# Altium PCB Copy of arduino_motor1.PcbDoc
Units mm, origin at the board's own origin, x right, y up, seen from the top; angles counter-clockwise.
Board outline 69.39 x 50.72 mm, 2 copper layers (Top Layer, Bottom Layer); 23 components, 22 nets, 93 pads, 0 vias.
Unrouted connection lines stored in the file: 9.
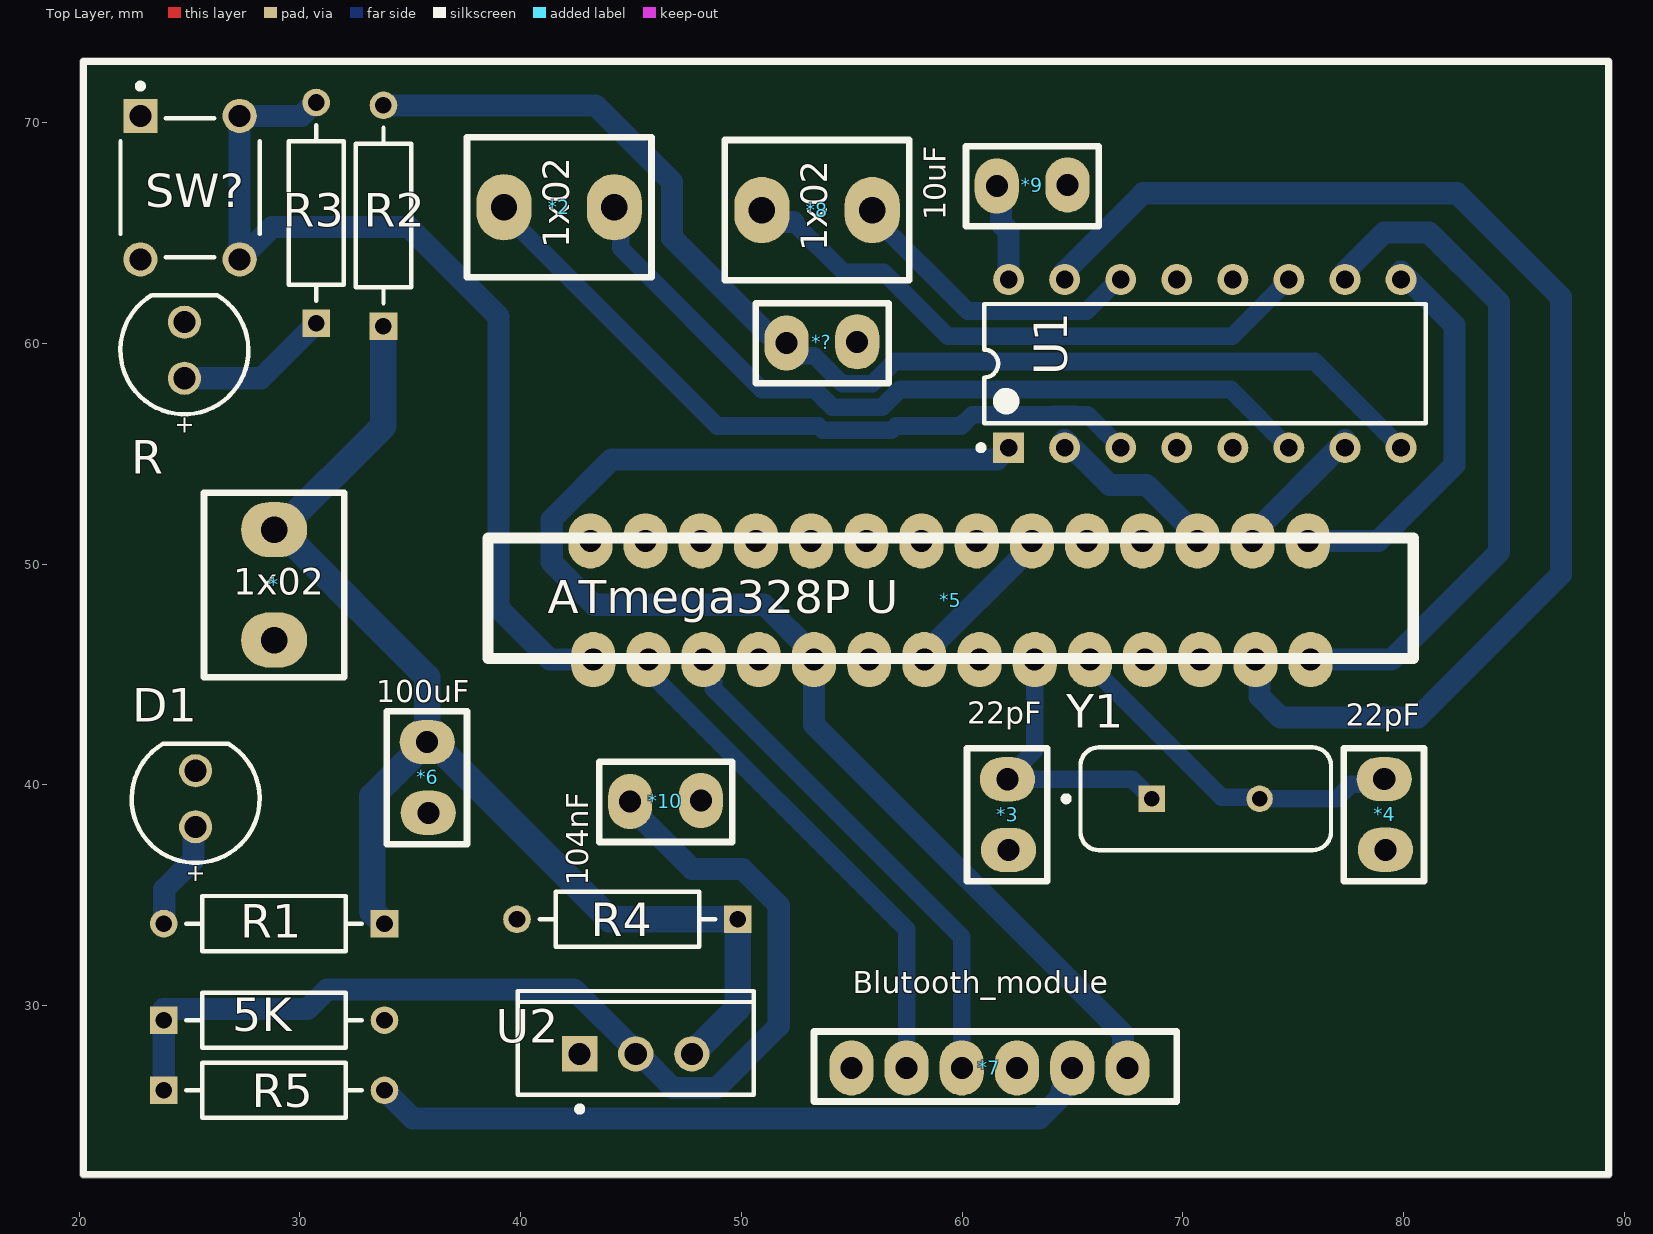
[diagram p0: Top Layer view]
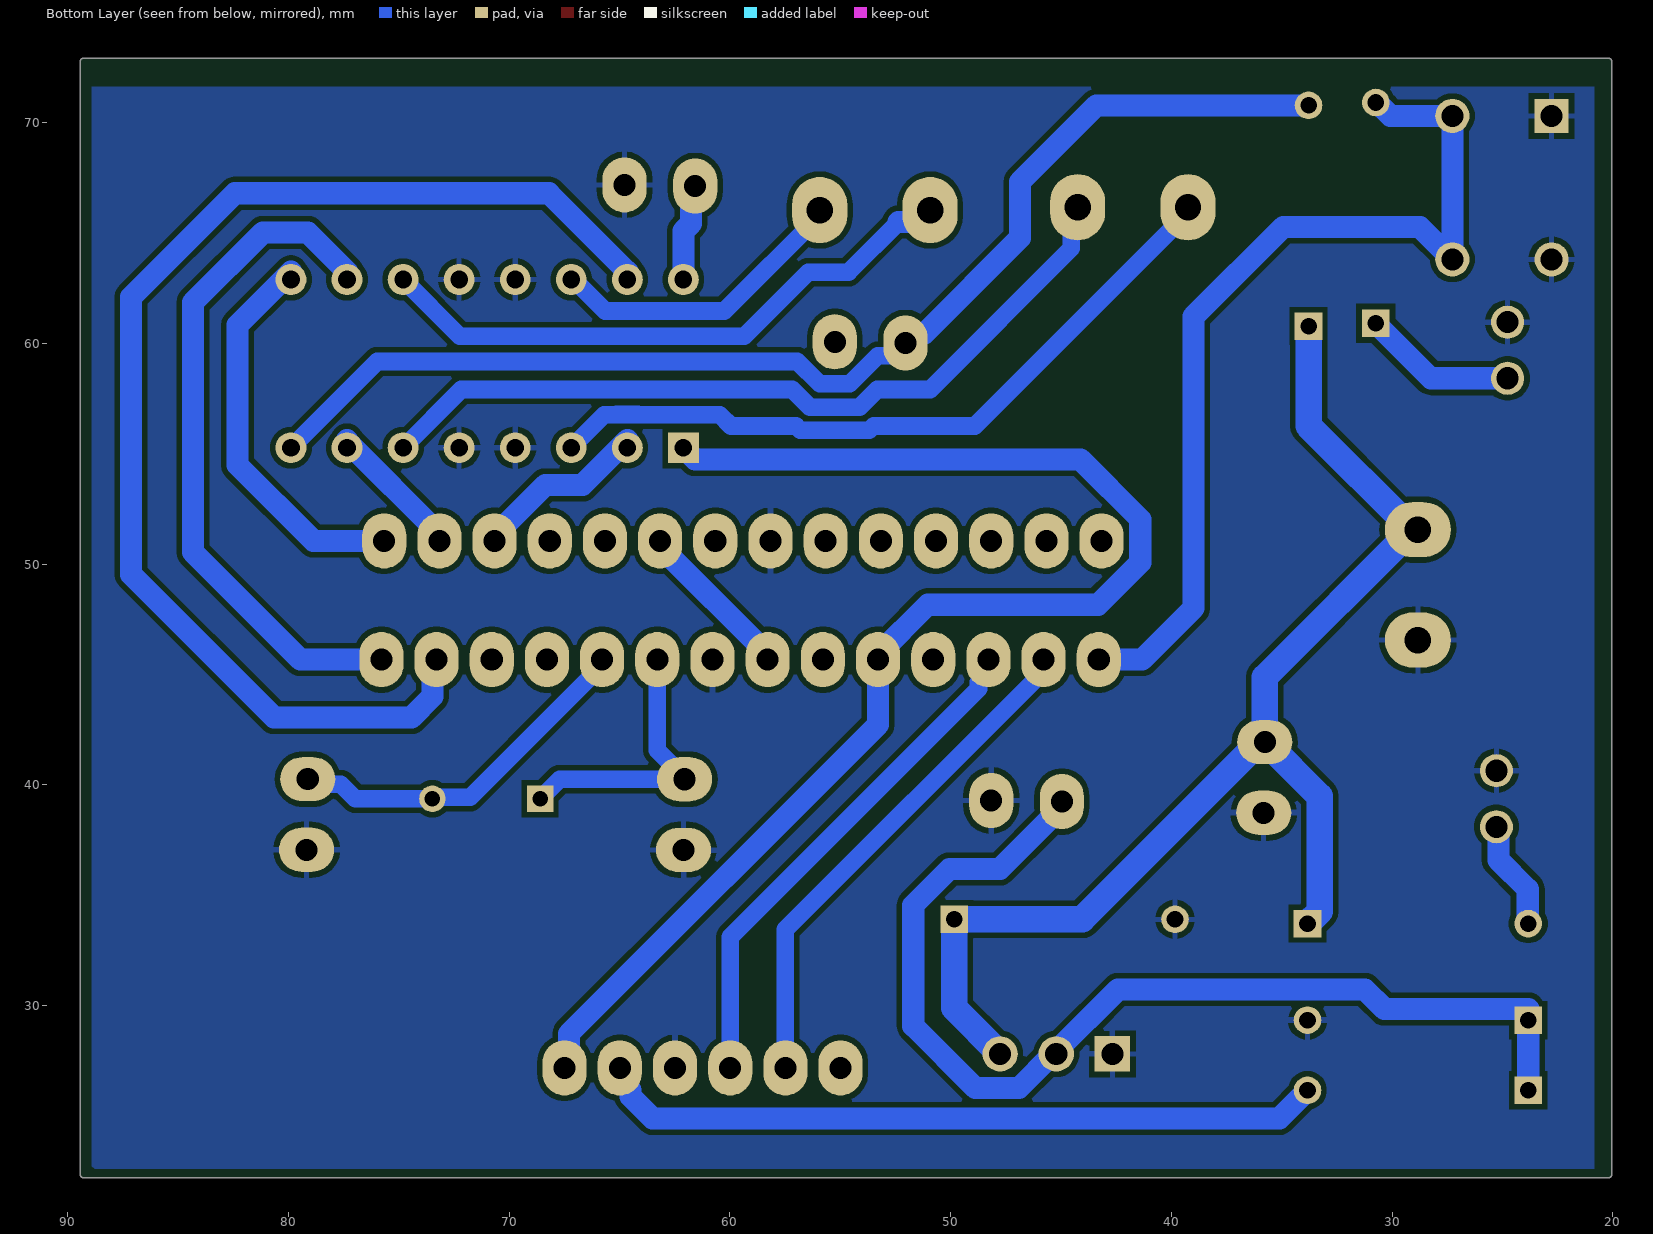
[diagram p1: Bottom Layer view, seen from below]

## Layer stack, top to bottom
Top Solder: solder mask 0.0102, Solder Resist, Dk 3.5
Top Layer: signal copper 0.0356
Dielectric 1: dielectric 0.32, FR-4, Dk 4.8
Bottom Layer: signal copper 0.0356
Bottom Solder: solder mask 0.0102, Solder Resist, Dk 3.5

## Board outline
20.193,22.202 cw(c20.193,22.352) 20.043,22.352 20.043,72.771 cw(c20.193,72.771) 20.193,72.921 89.281,72.921 cw(c89.281,72.771) 89.431,72.771 89.431,22.352 cw(c89.281,22.352) 89.281,22.202

## Design rules (kind name [scope] priority, off if disabled: settings)
Clearance Clearance_1 [All] p1: gap=0.254 ignorepadtopadclearanceinfootprint=FALSE
Clearance [All] p2: gap=0.254 ignorepadtopadclearanceinfootprint=FALSE
PolygonConnect [All] p1: connectstyle=Relief reliefconductorwidth=0.254 reliefentries=4 polygonreliefangle="90 Angle" airgapwidth=0.254
RoutingVias [All] p1: holewidth=0.711 width=1.27 viastyle="Through Hole" minholewidth=0.711 minwidth=1.27 maxholewidth=0.711 maxwidth=1.27
SolderMaskExpansion [All] p1: expansion=0.102 istentingtop=FALSE
Width Width_4 [All] p1: maxlimit=1.2 minlimit=0.254 preferedwidth=0.8
Width Width_3 [All] p2: maxlimit=1.2 minlimit=0.254 preferedwidth=0.8 toplayer_maxwidth=0.254 toplayer_prefwidth=0.254 minimp=50.000000 maximp=50.000000 favimp=50.000000
Width Width_2 [All] p3: maxlimit=1.2 minlimit=0.254 preferedwidth=0.254 toplayer_maxwidth=0.254 minimp=50.000000 maximp=50.000000 favimp=50.000000
Width [All] p4: maxlimit=0.254 minlimit=0.254 preferedwidth=0.254
Width Width_1 [(InNet('GND') AND OnLayer('Bottom 3D Body'))] p5: maxlimit=1.2 minlimit=0.254 preferedwidth=0.254 toplayer_maxwidth=0.254 minimp=50.000000 maximp=50.000000 favimp=50.000000
30 further rules are at their usual default settings.

## Components (designator, comment, footprint, x,y, rotation, side; value= is the part's Value field where it differs from the comment)
5K "MRS25000C1001FCT00" FP-MRS25-MFG 28.829,29.337 r0 top
* "Component_1" PCBComponent_1#1 28.448,50.546 r0 top
*2 "Component_1" PCBComponent_1#1 40.259,65.786 r90 top
*3 "capacitor" PCBComponent_1#2 60.397,41.779 r0 top
*4 "capacitor" PCBComponent_1#2 77.47,41.783 r0 top
*5 "Component_1" PCBComponent_1#3 43.986,47.502 r90 top
*6 "capacitor" PCBComponent_1#2 34.112,43.459 r0 top
*7 "Component_1" PCBComponent_1#4 58.286,28.956 r90 top
*8 "Component_1" PCBComponent_1#1 51.943,65.659 r90 top
*9 "capacitor" PCBComponent_1#2 60.046,65.481 r90 top
*10 "capacitor" PCBComponent_1#2 43.434,37.592 r90 top
*? "capacitor" PCBComponent_1#2 50.521,58.369 r90 top
D1 "151053GS03000" WL-TMRW_D5.8H11.7 25.273,39.37 r90 top
R "151053GS03000" WL-TMRW_D5.8H11.7 24.765,59.69 r90 top
R1 "MRS25000C1001FCT00" FP-MRS25-MFG 28.829,33.716 r180 top
R2 "MRS25000C1001FCT00" FP-MRS25-MFG 33.782,65.786 r90 top
R3 "MRS25000C1001FCT00" FP-MRS25-MFG 30.734,65.913 r90 top
R4 "MRS25000C1001FCT00" FP-MRS25-MFG 44.831,33.909 r180 top
R5 "MRS25000C1001FCT00" FP-MRS25-MFG 28.829,26.162 r0 top
SW? "EVQ-PAG07K" FP-EVQ-PAG07K-MFG 25.019,67.056 r0 top
U1 "L293D" STM-L293D-16 70.993,59.084 r90 top
U2 "LM317T" NDE0003A 45.212,27.813 r0 top
Y1 "FOXSLF/160-20" FOX-FOXSLF160-20 71.035,39.37 r0 top

## Footprints (in the part's own frame and the unit in brackets; to place one, negate y for a bottom-side part, rotate by r counter-clockwise, add the part's x,y. Pads: shape width x height; smd on the part's side, far side on the other; paste and mask are expansions set on the pad)
FOX-FOXSLF160-20 [mm] "THD, 2-Leads, Body 11.35x4.65mm"
  rect 1.2x1.2 hole 0.7: 1(-2.44,0)
  round 1.2 hole 0.7: 2(2.44,0)
  silkscreen extent -6.45,-2.32 5.68,2.32, body extent -5.67,-2.32 5.68,2.33, height 3.6
FP-EVQ-PAG07K-MFG [mm]
  rect 1.55x1.55 hole 1 paste-2539.97 mask+0: A(-2.25,3.25)
  round 1.55 hole 1 paste-2539.97 mask+0: A'(-2.25,-3.25) B(2.25,3.25) B'(2.25,-3.25)
  silkscreen extent -3.15,-3.15 3.15,4.72, body extent -3.25,-4.13 3.25,4.13, height 0.25
FP-MRS25-MFG [mm]
  rect 1.25x1.25 hole 0.75 paste-2539.97 mask+0: 1(-5,0)
  round 1.25 hole 0.75 paste-2539.97 mask+0: 2(5,0)
  silkscreen extent -3.98,-1.25 3.98,1.25, body extent -5.72,-1.35 5.72,1.35, height 0.25
NDE0003A [mm] "FM, 3-Leads, Body 10.7x4.7mm, Pitch 2.54mm"
  rect 1.6x1.6 hole 1: 1(-2.54,0)
  round 1.6 hole 1: 2(0,0) 3(2.54,0)
  silkscreen extent -5.35,-2.62 5.35,2.85, body extent -5.4,-1.9 5.4,2.9, height 19.4
PCBComponent_1#1 [mm]
  oval 3x2.5 hole 1.2: 1(0.381,1.016) 2(0.381,-3.984)
  silkscreen extent -2.8,-5.66 3.56,2.69
PCBComponent_1#2 [mm]
  oval 2.5x2 hole 1: 1(1.651,-1.524) 2(1.702,-4.724)
  silkscreen extent -0.18,-6.15 3.45,-0.13
PCBComponent_1#3 [mm]
  oval 2.5x2 hole 1: 1(-1.829,0.7) 2(-1.829,-1.8) 3(-1.829,-4.3) 4(-1.829,-6.8) 5(-1.829,-9.3) 6(-1.829,-11.8) 6(3.552,-4.173) 7(-1.829,-14.3) 8(-1.829,-16.8) 8(3.552,0.827) 9(-1.829,-19.3) 10(-1.829,-21.8) 11(-1.829,-24.3) 12(-1.829,-26.8) 13(-1.829,-29.3) 14(-1.829,-31.8) 15(3.552,-31.673) 16(3.552,-29.173) 17(3.552,-26.673) 18(3.552,-24.173) 19(3.552,-21.673) 20(3.552,-19.173) 21(3.552,-16.673) 22(3.552,-14.173) 23(3.552,-11.673) 24(3.552,-9.173) 25(3.552,-6.673) 27(3.552,-1.673)
  silkscreen extent -1.78,-36.45 3.68,5.46
PCBComponent_1#4 [mm]
  oval 2.5x2 hole 1: 1(-1.778,3.302) 2(-1.778,0.802) 3(-1.778,-1.698) 4(-1.778,-4.198) 5(-1.778,-6.698) 6(-1.778,-9.198)
  silkscreen extent -3.3,-11.43 -0.13,5
STM-L293D-16 [mm] "DIP, 16-Leads, Body 20x6.85mm, Pitch 2.54mm"
  rect 1.4x1.4 hole 0.8: 1(-3.81,8.89)
  round 1.4 hole 0.8: 2(-3.81,6.35) 3(-3.81,3.81) 4(-3.81,1.27) 5(-3.81,-1.27) 6(-3.81,-3.81) 7(-3.81,-6.35) 8(-3.81,-8.89) 9(3.81,-8.89) 10(3.81,-6.35) 11(3.81,-3.81) 12(3.81,-1.27) 13(3.81,1.27) 14(3.81,3.81) 15(3.81,6.35) 16(3.81,8.89)
  silkscreen extent -3.93,-10 2.7,10.26, body extent -3.93,-10 3.93,10, height 5.1
WL-TMRW_D5.8H11.7 [mm] "THT Mono-color Round LED, 2-leads"
  round 1.5 hole 1: 1(1.27,0) 2(-1.27,0)
  silkscreen extent -2.9,-2.9 2.5,2.9, body extent -2.9,-2.9 2.5,2.9, height 11.7

## Part data
5K R1 R2 R3 R4 R5: library part CMP-02408-000051-1, "RES 1K OHM 0.6W 1% AXIAL", Case/Package=Axial, Max Operating Temperature=155°C, Max Power Dissipation=600mW, Min Operating Temperature=-55°C, Package Quantity=5000, Resistance=1kR, Resistance Tolerance=1%, Resistor Type="Metal Film", Temperature Coefficient=50ppm/°C, Voltage Rating=350V, Construction=Cylindrical, Contact Plating=Tin, Diameter=2.5mm, Lead Diameter=0.6mm, Lead Free="Lead Free", Length=6.5mm, Military Standard=Not, Mount="Through Hole", Number of Pins=2, Number of Terminations=2, Packaging="Tape and Reel", Power Rating=600mW, Radiation Hardening=No, RoHS Compliant=Yes, Series=MRS25, Technology="THIN FILM", Termination=Axial, Tolerance=1%, Voltage Rating (DC)=350V, Weight=0.00776oz, Width=2.5mm
D1 R: library part CMP-1489-00005-2, Case/Package=Radial, Color=Green, Forward Current=100mA, Forward Voltage=3.4V, Max Operating Temperature=85°C, Max Reverse Voltage (DC)=5V, Min Operating Temperature=-40°C, Test Current=20mA, Dominant Wavelength=522nm, Height=8.6mm, Length=5mm, Lens Size=5mm, Lens Style="Circular, Clear, Round", Luminous Intensity=10cd, Mount="Through Hole", NexarPartId=29717817, Packaging=Bulk, Peak Wavelength=515nm, REACH SVHC=Unknown, RoHS=Compliant, Viewing Angle=30°, Wavelength=522nm, Width=5mm
SW?: library part CMP-05618-000034-1, "SWITCH TACTILE SPST-NO 0.02A 15V", Actuator Color=Black, Contact Current Rating=20mA, Contact Resistance=50mR, Max Operating Temperature=70°C, Max Voltage Rating (DC)=15V, Min Operating Temperature=-20°C, Operating Force=2.6N, Package Quantity=500, Actuator Length=3.1mm, Actuator Type=Standard, Current Rating=20mA, Depth=7.8mm, Electrical Life=50000Cycles, Illumination Type=Non-Illuminated, Lead Free="Lead Free", Length=6mm, Max Current Rating=20mA, Mechanical Life=50000Cycles, Mount="Through Hole", Orientation=Straight, Packaging=Bulk, Radiation Hardening=No, RoHS Compliant=Yes, Series=EVQPA, Size=6mm, Switch Function=Off-Mom, Switch Travel=0.25mm, Termination="PC Pin", Throw Configuration=SPST, Voltage Rating (DC)=15V
U1: library part CMP-2000-06524-1, "Push-Pull Four Channel Driver with Diode, 4.5 to 36 V, -40 to 150 degC, 16-Pin PDIP, RoHS, Tube", Current - Output / Channel=600mA, Current - Peak Output=1.2A, Manufacturer=STMicroelectronics, On-State Resistance=-, Operating Temperature=-40°C~150°C, Package / Case="16-DIP(0.300\",7.62mm)", Package Description="16-Pin Thru-Hole Dual-In-Line, Body 20 x 6.85 mm, Pitch 2.54 mm", Package Reference=DIP-16, Standard Package=25, Supplier Device Package=16-PowerDIP, Voltage - Supply=4.5V~36V, Category=IntegratedCircuits(ICs), Datasheet URL=http://www.st.com/st-web-ui/static/active/en/resource/technical/document/datasheet/CD00000059.pdf, Datasheet Version=07/2003, Dynamic Catalog=HalfBridge, Family=PMIC-MOSFET,BridgeDrivers-InternalSwitch, Input Type=Non-Inverting, Manufacturer URL=http://www.st.com/, Mounting Technology=ThroughHole, Mounting Type=ThroughHole, Number of Outputs=4, Other Names=497-2936-5, Other Related Documents=L293DViewAllSpecifications, Packaging=Tube, PartNumber=L293D, Series=-, Type=HalfBridge
U2: library part CMP-0062-02456-3, "3-Terminal Adjustable Regulator, 3-pin TO-220", Manufacturer="Texas Instruments", PackageTopMarking="NSUZXYTTE#*LM317T P+", PowerWise=N, ComponentLink1Description="Datasheet URL", ComponentLink1URL=http://www.ti.com/general/docs/lit/getliterature.tsp?genericPartNumber=LM317-N&fileType=pdf, CompType="LDO IC", PackageDescription="TO-220, Molded, 3 Lead, Straight", PackageReference=NDE0003A, PinCount=3, RoHS=N
Y1: library part CMP-1749-00003-1, "Resistance Weld Thru-Hole Crystal, 16 MHz, -20 to 70 degC, 2-Pin THD, RoHS, Bulk", Case\Package=Axial, Max Operating Temperature="155 degC", Min Operating Temperature="-55 degC", Package Quantity=200, Power Rating="250 mW", Resistance="221 kohm", Tolerance=1%, Voltage Rating="250 V", ComponentLink1Description="Manufacturer URL", ComponentLink1URL=http://www.foxonline.com/, ComponentLink2Description=Datasheet, ComponentLink2URL=http://www.foxonline.com/pdfs/hc49slf.pdf, DatasheetVersion=Mar-15, Length="0.248 inch", Mount="Through Hole", PackageDescription="2-Pin Through Hole Device, Body 11.35 x 4.65 mm", PackageReference=FOXSLF160-20, Packaging=Bulk, RoHSCompliant=true

## Nets (pads, with @x,y where several pads share a name; then routed paths per layer and width w, separated by ;. In a path a pad name is that pad's centre, name@x,y a point inside that pad or via, vN(x,y) a via of type N, cw(c..) or ccw(c..) an arc to the next point about the centre after c; other vN are vias at no path point)
GND: 5K.2 *3.2 *4.2 *5.8 *5.22 *6.2 *7.4 *9.2 *10.2 *.2 *?.2 D1.1 R4.2 R.1 SW?.A SW?.A' U1.4 U1.5 U1.12 U1.13 U2.1
Net5K_1: 5K.1 *5.7 *5.20 *9.1 *10.1 R5.1 U1.16 U2.2 | length 61.2
  Bottom Layer w1: R5.1 23.829,29.316 23.829,29.845 30.347,29.845 31.236,30.734 42.417,30.734 45.212,27.939 U2.2 45.357,27.813 46.911,26.259 48.865,26.259 51.689,29.083 51.689,34.544 50.038,36.195 47.756,36.195 44.958,38.993 *10.1 ; *5.7 58.286,45.927 63.159,50.8 *5.20 ; *9.1 61.761,66.941 61.761,65.436 62.103,65.094 U1.16
Net*2_1: *2.1 U1.3 | length 33.2
  Bottom Layer w0.8: *2.1@39.243,65.917 48.899,56.261 53.485,56.261 53.687,56.059 56.803,56.059 57.005,56.261 59.944,56.261 60.452,56.769 64.154,56.769 64.165,56.78 65.121,56.78 65.132,56.769 65.688,56.769 U1.3
  Bottom Layer w1: *2.1@39.243,65.917 *2.1
Net*2_2: *2.2 U1.6 | length 36.7
  Bottom Layer w0.8: *2.2@44.53,65.88 44.53,64.309 50.927,57.912 53.324,57.912 54.123,57.113 56.367,57.113 57.166,57.912 72.165,57.912 U1.6
  Bottom Layer w1: *2.2 *2.2@44.53,65.88
Net*3_1: *3.1 *5.9 Y1.1 | length 12.9
  Bottom Layer w0.8: *5.9@63.252,45.639 *5.9 63.286,41.567 62.048,40.329 *3.1 67.71,40.255 Y1.1
Net*4_1: *4.1 *5.10 Y1.2 | length 16.5
  Bottom Layer w0.8: *5.10 65.786,45.423 71.762,39.447 73.398,39.447 Y1.2 76.962,39.37 77.621,40.029 78.891,40.029 *4.1
Net*5_1: *5.1 R3.2 SW?.B SW?.B' | length 42.7
  Bottom Layer w1: R3.2 30.666,70.913 30.059,70.306 SW?.B SW?.B' 28.741,65.278 34.925,65.278 38.989,61.214 38.989,48.006 41.322,45.673 *5.1
Net*5_2: *5.2 *7.2 | length 23.3
  Bottom Layer w0.8: *5.2 45.786,45.146 57.484,33.448 *7.2
Net*5_3: *5.3 *7.3 | length 23.3
  Bottom Layer w0.8: *5.3 48.286,45.098 48.733,44.652 48.733,44.358 59.984,33.107 *7.3
Net*5_5: *5.5 *7.6 U1.1 | length 62.2
  Bottom Layer w1: U1.1 61.566,54.737 44.111,54.737 41.405,52.031 41.405,50.077 43.324,48.159 51.031,48.159 53.286,45.904 *5.5 53.286,42.726 67.293,28.719 67.293,27.369 *7.6
Net*5_13: *5.13 U1.15 | length 56.9
  Bottom Layer w1: U1.15@64.643,63.246 68.199,66.802 82.423,66.802 87.122,62.103 87.122,49.53 80.645,43.053 74.422,43.053 73.477,43.998 73.477,45.482 *5.13
Net*5_14: *5.14 U1.10 | length 30.9
  Bottom Layer w1: *5.14 79.455,45.673 84.328,50.546 84.328,61.849 81.153,65.024 79.121,65.024 U1.10@77.343,63.246
Net*5_15: *5.15 U1.9 | length 17.8
  Bottom Layer w1: *5.15 78.867,51.054 82.296,54.483 82.296,60.833 U1.9@79.883,63.246
Net*5_16: *5.16 U1.7 | length 6.3
  Bottom Layer w1: *5.16 73.159,51.373 77.343,55.557 U1.7@77.343,55.626
Net*5_17: *5.17 U1.2 | length 8
  Bottom Layer w1: U1.2@64.643,55.626 66.684,53.585 68.358,53.585 70.659,51.285 *5.17
Net*6_1: *6.1 *.1 R1.1 R2.1 R4.1 U2.3 | length 57.7
  Bottom Layer w1.2: *.1 *.1@29.079,51.562 ; R2.1 33.782,56.265 *.1@29.079,51.562 ; R1.1 33.274,34.271 33.274,39.48 35.73,41.935 *6.1 ; U2.3 49.831,29.892 R4.1 44.04,33.909 36.013,41.935 *6.1 ; *.1@29.079,51.562 35.763,44.878 *6.1
Net*7_5: *7.5 R5.2 | length 33.1
  Bottom Layer w1: R5.2 35.099,24.892 63.5,24.892 64.492,25.884 64.492,26.166 64.984,26.657 *7.5
Net*8_1: *8.1 U1.11 | length 27.3
  Bottom Layer w0.8: 52.353,65.503 54.627,63.229 56.45,63.229 59.354,60.325 72.234,60.325 U1.11
  Bottom Layer w1: *8.1 51.464,65.503 52.353,65.503
Net*8_2: *8.2 U1.14 | length 13.9
  Bottom Layer w0.8: *8.2@55.927,65.79 60.249,61.468 65.649,61.468 U1.14@67.075,62.894
  Bottom Layer w1: *8.2@55.927,65.79 *8.2 ; U1.14@67.075,62.894 U1.14
Net*?_1: *?.1 R2.2 U1.8 | length 55.2
  Bottom Layer w0.8: *?.1 52.119,60.02 52.704,59.436 53.291,59.436 54.56,58.167 55.93,58.167 56.945,59.182 75.975,59.182 U1.8 ; 55.118,59.944 55.118,60.194 ; 55.139,59.944 55.193,59.944
  Bottom Layer w1: R2.2 43.387,70.786 46.863,67.31 46.863,64.77 51.171,60.462 51.603,60.462 *?.1 ; 55.118,59.944 55.139,59.944
NetD1_2: D1.2 R1.2 | length 5
  Bottom Layer w1: R1.2 23.85,33.737 23.85,35.272 25.177,36.599 25.177,38.005 D1.2
NetR3_1: R3.1 R.2 | length 7
  Bottom Layer w1: R.2 28.241,58.42 R3.1
pads on no net: *5.4 *5.6 *5.11 *5.12 *5.18 *5.19 *5.21 *5.23 *5.24 *5.25 *5.27 *7.1
copper on no net: | length 0.5
  Bottom Layer w1: 70.786,45.152 70.786,45.673

## Polygon pours and split planes (outlines as drawn)
GND on Bottom Layer "NONET_L-01_P-001" (solid, remove dead copper, pour order 0): 20.828,71.628 88.9,71.628 88.9,22.733 88.773,22.606 20.828,22.606

## Silkscreen, mask and mechanical layers (free items; w line width, h text height)
Top Overlay:
  lines w0.3: 20.193,22.352 38.862,22.352 70.612,22.352 89.281,22.352 89.281,46.115 89.281,49.699 89.281,61.849 89.281,72.771 20.193,72.771 20.193,57.203 20.193,39.726 20.193,22.352

## Text inside footprints (layer, text, board x,y; h text height)
*: Top Overlay "1x02" at 26.97,48.611 h1.2
*2: Top Overlay "1x02" at 42.194,64.308 h1.2 r90
*3: Top Overlay "22pF" at 60.24,42.767 h1
*4: Top Overlay "22pF" at 77.389,42.67 h1
*5: Top Overlay "ATmega328P U" at 41.217,47.767 h1.5
*6: Top Overlay "100uF" at 33.447,43.734 h1
*7: Top Overlay "Blutooth_module" at 55.037,30.566 h1
*8: Top Overlay "1x02" at 53.878,64.181 h1.2 r90
*9: Top Overlay "10uF" at 59.263,65.578 h1 r90
*10: Top Overlay "104nF" at 43.058,35.428 h1 r90
D1: Top Overlay "+" at 25.623,35.52 h0.8 r90
R: Top Overlay "+" at 25.115,55.84 h0.8 r90